# Altium PCB CW308T_LPC1343.PcbDoc
Units mil, origin at the board's own origin, x right, y up, seen from the top; angles counter-clockwise.
Board outline 2055 x 2540 mil, 2 copper layers (Top Layer, Bottom Layer); 20 components, 35 nets, 162 pads, 119 vias.
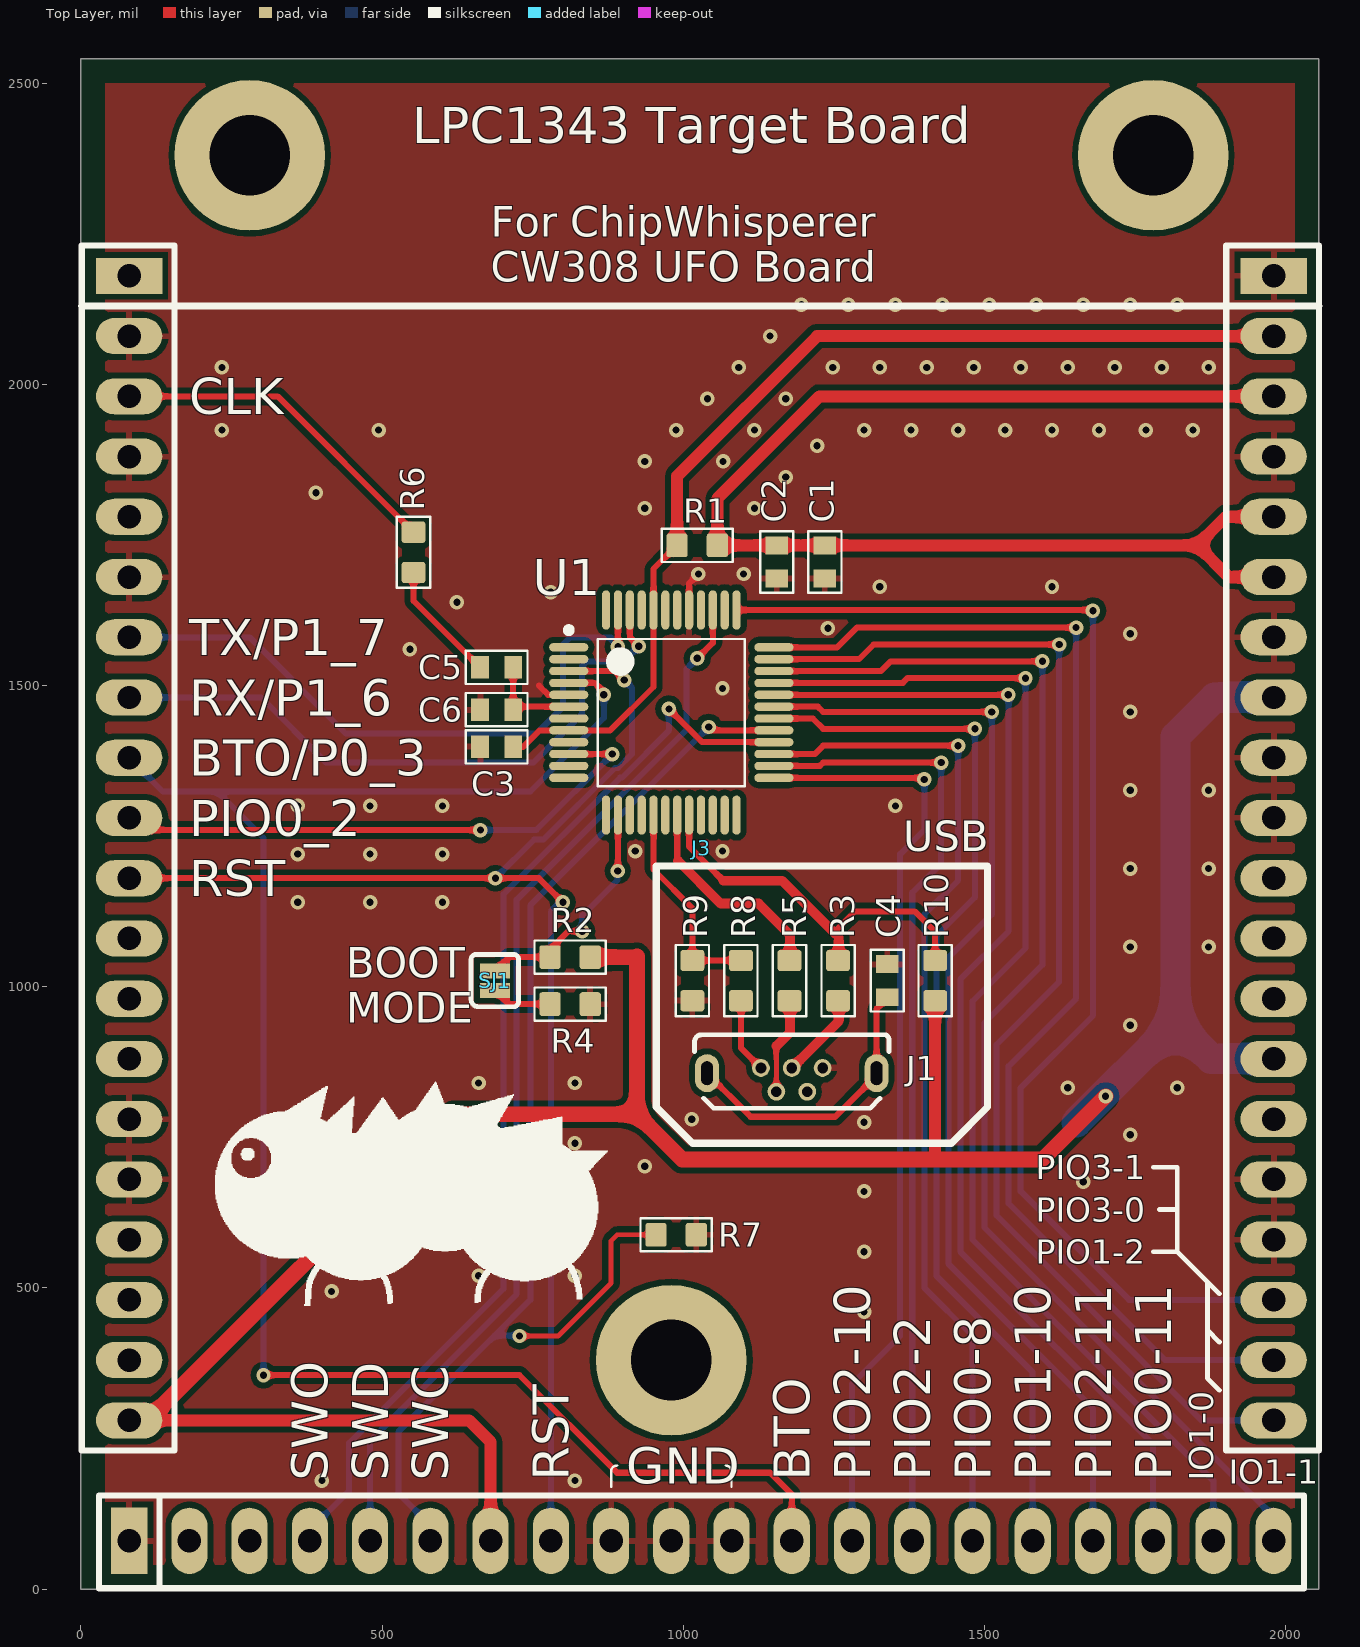
[diagram p0: Top Layer view]
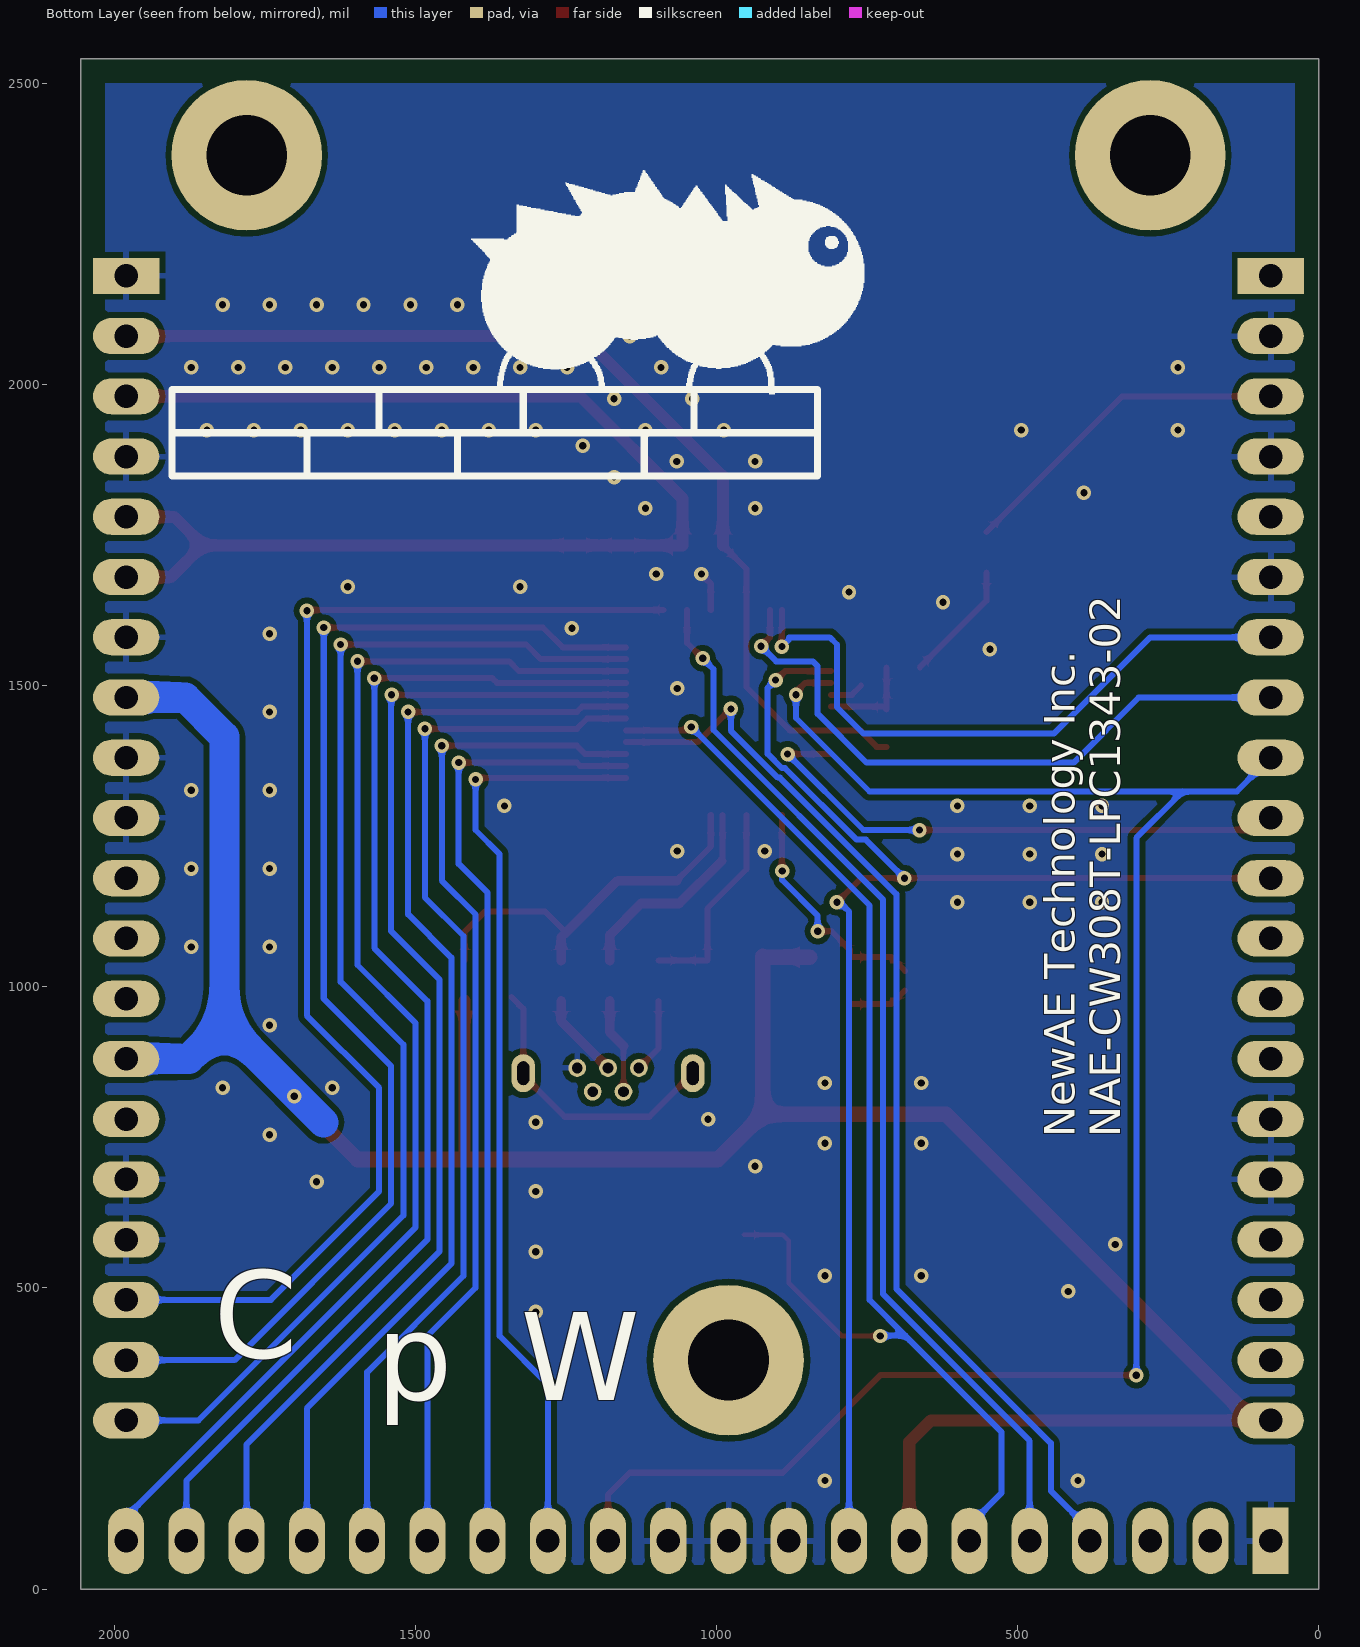
[diagram p1: Bottom Layer view, seen from below]

## Layer stack, top to bottom
Top Solder: solder mask 0.4, Solder Resist, Dk 3.5
Top Layer: signal copper 1.4
Dielectric 1: dielectric 12.6, FR-4, Dk 4.8
Bottom Layer: signal copper 1.4
Bottom Solder: solder mask 0.4, Solder Resist, Dk 3.5

## Board outline
0,0 2055,0 2055,2540 0,2540

## Design rules (kind name [scope] priority, off if disabled: settings)
BoardOutlineClearance Silk_to_Outline [(OnLayer('Top Overlay'))] p1: gap=0 ignorepadtopadclearanceinfootprint=FALSE
BoardOutlineClearance [All] p2: gap=40 ignorepadtopadclearanceinfootprint=FALSE
Clearance Clearance_Power [InNet('+*') OR InNet('-*') OR InNet('GND')] p1: gap=10 ignorepadtopadclearanceinfootprint=FALSE
Clearance [All] p2: gap=6 ignorepadtopadclearanceinfootprint=FALSE except(0: Arc-Hole Track-Hole SMDPad-Hole THPad-Hole Via-Hole Fill-Hole Poly-Hole Region-Hole Text-Hole)
DiffPairsRouting [InDifferentialPair('USBD')] p1: maxlimit=10 minlimit=8 mostfreqgap=8 toplayer_minwidth=8 toplayer_maxwidth=20 toplayer_prefwidth=16 bottomlayer_minwidth=8 bottomlayer_maxwidth=20 bottomlayer_prefwidth=16 substack1={8800B28A-0589-4E51-BD48-D091C3F5FEA0} toplayer_{8800b28a-0589-4e51-bd48-d091c3f5fea0}_minwidth=15 toplayer_{8800b28a-0589-4e51-bd48-d091c3f5fea0}_maxwidth=15 toplayer_{8800b28a-0589-4e51-bd48-d091c3f5fea0}_prefwidth=15 bottomlayer_{8800b28a-0589-4e51-bd48-d091c3f5fea0}_minwidth=15 bottomlayer_{8800b28a-0589-4e51-bd48-d091c3f5fea0}_maxwidth=15 bottomlayer_{8800b28a-0589-4e51-bd48-d091c3f5fea0}_prefwidth=15 maxuncoupledlength=500
HoleSize [All] p1: absolutevalues=TRUE maxlimit=200 minlimit=1 maxpercent=80.000 minpercent=20.000
MinimumSolderMaskSliver [All] p1: minsoldermaskwidth=5
PlaneConnect PlaneConnect_viaDirect [IsVia] p1: planeconnectstyle=Direct reliefexpansion=20 reliefentries=4 reliefconductorwidth=10 reliefairgap=10
PlaneConnect [All] p2: planeconnectstyle=Relief reliefexpansion=20 reliefentries=4 reliefconductorwidth=10 reliefairgap=10
PolygonConnect PolygonConnect_viaDirect [All vs isVia] p1: connectstyle=Direct reliefconductorwidth=10 reliefentries=4 polygonreliefangle="90 Angle" airgapwidth=10
PolygonConnect [All] p2: connectstyle=Relief reliefconductorwidth=10 reliefentries=4 polygonreliefangle="90 Angle" airgapwidth=10
RoutingVias [All] p1: holewidth=28 width=50 viastyle="Through Hole" minholewidth=28 minwidth=50 maxholewidth=28 maxwidth=50 useviatemplates=TRUE viatemplateguid#1={061DF218-48E8-48E5-9562-D50E5290F33F} viatemplateguid#2={ED942516-BDC6-4395-8D39-055E9FB32128} viatemplateguid#3={16B6B314-1114-45EC-9B74-E6FA84815E14} viatemplatename#1=v61h30m0mx0 viatemplatename#2=v86h41m0mx0 viatemplatename#3=v127h71m0mx0
SilkToSilkClearance [All] p1: silktosilkclearance=5
SilkToSolderMaskClearance [IsPad] p1: minsilkscreentomaskgap=5 clearancetoexposedcopper=TRUE
SolderMaskExpansion [All] p1: expansion=4 istentingtop=FALSE
Width [All] p1: maxlimit=100 minlimit=8 preferedwidth=10 substack1={8800B28A-0589-4E51-BD48-D091C3F5FEA0}
24 further rules are at their usual default settings.

## Classes and differential pairs
component class CW308T_LPC1343: C1 C2 C3 C4 C5 C6 J1 R1 R2 R3 R4 R5 R6 R8 R9 R10 SJ1 U1
component class Connectors: J3 R7
differential pair USBD: +USBD_P -USBD_N

## Components (designator, comment, footprint, x,y, rotation, side; value= is the part's Value field where it differs from the comment)
C1 "2u2" CAPC0603_M 1235,1705 r270 top
C2 "100n" CAPC0603_M 1155,1705 r270 top
C3 "100n" CAPC0603_M 690,1398 r180 top
C4 "100n" CAPC0603_M 1338.38,1010 r270 top
C5 "100p" CAPC0603_M 690,1530 r180 top
C6 "100p" CAPC0603_M 690,1460 r180 top
J1 "614105150721" 614105150721 1128.82,865 r0 top
J3 "CW308_TARGETCON" CW308_TBOARD_CONN 80,2180 r0 top locked
R1 "12R" RESC1608X55N 1023,1732.56 r180 top
R2 "10k" RESC1608X55N 812,1049 r180 top
R3 "33R" RESC1608X55N 1256.8,1010 r90 top
R4 "1k" RESC1608X55N 812,971 r0 top
R5 "33R" RESC1608X55N 1176.2,1010 r90 top
R6 "33R" RESC1608X55N 552,1721 r90 top
R7 "10k" RESC1608X55N 988,588 r0 top
R8 "1k" RESC1608X55N 1095.6,1010 r90 top
R9 "2k" RESC1608X55N 1015,1010 r270 top
R10 "1k5" RESC1608X55N 1418,1010 r90 top
SJ1 "NC" SJ_2S_NC 687,1010 r90 top
U1 "LPC1343FBD48" LQFP50P900X900X160-48M 980,1455 r0 top locked

## Footprints (in the part's own frame and the unit in brackets; to place one, negate y for a bottom-side part, rotate by r counter-clockwise, add the part's x,y. Pads: shape width x height; smd on the part's side, far side on the other; paste and mask are expansions set on the pad)
614105150721 [mm] "Upright USB"
  round 0.75 hole 0.45: 1(0,0) 2(0.65,-1) 3(1.3,0) 4(1.95,-1) 5(2.6,0)
  rrect100% 1x1.6 hole 0.5 slot 1 at 90 deg: S1(-2.275,-0.22) S2(4.875,-0.22)
  silkscreen extent -2.8,-1.7 5.4,1.4, body extent -2.7,-1.6 5.3,1.3, height 5.66
CAPC0603_M [mm]
  rect 0.75x0.95 smd: 1(-0.7,0) 2(0.7,0)
  silkscreen extent -1.3,-0.7 1.3,0.7, body extent -0.85,-0.45 0.85,0.45, height 0.9
CW308_TBOARD_CONN [mil]
  rect 110x60 hole 39: A1(0,0) C1(1900,0)
  oval 110x60 hole 39: A2(0,-100) A3(0,-200) A4(0,-300) A5(0,-400) A6(0,-500) A7(0,-600) A8(0,-700) A9(0,-800) A10(0,-900) A11(0,-1000) A12(0,-1100) A13(0,-1200) A14(0,-1300) A15(0,-1400) A16(0,-1500) A17(0,-1600) A18(0,-1700) A19(0,-1800) A20(0,-1900) C2(1900,-100) C3(1900,-200) C4(1900,-300) C5(1900,-400) C6(1900,-500) C7(1900,-600) C8(1900,-700) C9(1900,-800) C10(1900,-900) C11(1900,-1000) C12(1900,-1100) C13(1900,-1200) C14(1900,-1300) C15(1900,-1400) C16(1900,-1500) C17(1900,-1600) C18(1900,-1700) C19(1900,-1800) C20(1900,-1900)
  rect 60x110 hole 39: B1(0,-2100)
  oval 60x110 hole 39: B2(100,-2100) B3(200,-2100) B4(300,-2100) B5(400,-2100) B6(500,-2100) B7(600,-2100) B8(700,-2100) B9(800,-2100) B10(900,-2100) B11(1000,-2100) B12(1100,-2100) B13(1200,-2100) B14(1300,-2100) B15(1400,-2100) B16(1500,-2100) B17(1600,-2100) B18(1700,-2100) B19(1800,-2100) B20(1900,-2100)
  round 250 hole 134: MH1(200,200) MH2(900,-1800) MH2(1700,200)
  silkscreen extent -79,-2179 1975,50, body extent -50,-2149 1950,50, height 48
LQFP50P900X900X160-48M [mm] "LQFP, 48-Leads, Body 7.00x7.00mm, Pitch 0.50mm, IPC Low Density"
  oval 1.65x0.35 smd paste-0.051: 1(-4.325,2.75) 2(-4.325,2.25) 3(-4.325,1.75) 4(-4.325,1.25) 5(-4.325,0.75) 6(-4.325,0.25) 7(-4.325,-0.25) 8(-4.325,-0.75) 9(-4.325,-1.25) 10(-4.325,-1.75) 11(-4.325,-2.25) 12(-4.325,-2.75) 25(4.325,-2.75) 26(4.325,-2.25) 27(4.325,-1.75) 28(4.325,-1.25) 29(4.325,-0.75) 30(4.325,-0.25) 31(4.325,0.25) 32(4.325,0.75) 33(4.325,1.25) 34(4.325,1.75) 35(4.325,2.25) 36(4.325,2.75)
  oval 0.35x1.65 smd paste-0.051: 13(-2.75,-4.325) 14(-2.25,-4.325) 15(-1.75,-4.325) 16(-1.25,-4.325) 17(-0.75,-4.325) 18(-0.25,-4.325) 19(0.25,-4.325) 20(0.75,-4.325) 21(1.25,-4.325) 22(1.75,-4.325) 23(2.25,-4.325) 24(2.75,-4.325) 37(2.75,4.325) 38(2.25,4.325) 39(1.75,4.325) 40(1.25,4.325) 41(0.75,4.325) 42(0.25,4.325) 43(-0.25,4.325) 44(-0.75,4.325) 45(-1.25,4.325) 46(-1.75,4.325) 47(-2.25,4.325) 48(-2.75,4.325)
  silkscreen extent -4.45,-3.1 3.1,3.6, body extent -4.5,-4.5 4.5,4.5, height 1.6
RESC1608X55N [mm] "Chip Resistor, Body 1.6x0.8mm, EIA 0603, IPC Medium Density"
  round 0.254 on Mech15: 0(0,0)
  rrect25% 0.9x1 smd: 1(-0.85,0) 2(0.85,0)
  Top Layer pour cut-out: -0.6,0.5 0.6,0.5 0.6,-0.5 -0.6,-0.5
  silkscreen extent -1.5,-0.7 1.5,0.7, body extent -0.87,-0.47 0.88,0.48, height 0.54
SJ_2S_NC [mil] "Solder Jumper, closed with solder paste"
  rect 25x50 smd: 1(-16.22,0) 2(16.22,0)
  silkscreen extent -43,-39 43,39

## Part data
C1: library part CCHIP-2u2-0603, "2u2, 0603", Case-EIA=0603, Case-Metric=1608, Manufacture 1=Samsung, Manufacture Part Number 1=CL10B225KP8NNNC, Rated Voltage=10VDC, Supplier Part Number 1=1276-1134-2-ND, Component Group=Capacitor, Component Type=Standard, Mounting Technology=SMT, Part Number=CCHIP-2u2-0603, Pin Count=2, Supplier 1=Digi-Key
C2 C3 C4: library part CCHIP-100n-0603, "100n, 0603", Case-EIA=0603, Case-Metric=1608, Manufacture 1=Kemet, Manufacture Part Number 1=C0603C104K5RACTU, Rated Voltage=50VDC, Supplier Part Number 1=399-5089-2-ND, Component Group=Capacitor, Component Type=Standard, Mounting Technology=SMT, Part Number=CCHIP-100n-0603, Pin Count=2, Supplier 1=Digi-Key
C5 C6: library part CCHIP-100p-0603, "100p, 0603", Case-EIA=0603, Case-Metric=1608, Manufacture 1=KEMET, Manufacture Part Number 1=C0603C101K5RACTU, Rated Voltage=50V, Supplier Part Number 1=399-7824-1-ND, Component Group=Capacitor, Component Type=Standard, Mounting Technology=SMT, Part Number=CCHIP-100p-0603, Pin Count=2, RoHS=Yes, Supplier 1=Digi-Key
J1: "USB, 5-pin, Upright", Manufacture 1="Wurth Electronics", Supplier Part Number 1=732-5958-1-ND, Component Group=Connector, Component Type=Standard, Manufacture Part Number 1=614105150721, Mounting Technology=Through-hole, Part Number=614105150721, Pin Count=7, PP Material Stack=0, PP Rotation=0, RoHS=Yes, Supplier 1=Digi-Key
J3: library part CW308_TBOARD, "CW308 \"Standard\" Target Board Connector", Component Group=Mechanical, Component Type=Standard, Mounting Technology=Through-hole, Part Number=CW308_TBOARD, Pin Count=60, Pitch=2.54mm
R1: library part RCHIP-12R-0603, "12R res, 0603, 1%, 1/10W", Case-EIA=0603, Case-Metric=1608, Manufacture 1=Yageo, Manufacture Part Number 1=RC0603FR-0712RL, Rated Power=0.1W, Rated Voltage=75VDC, Supplier Part Number 1=311-12.0HRCT-ND, Temperature Range="-55C to 155C", Tolerance=1%, Component Group=Resistor, Component Type=Standard, Mounting Technology=SMT, Part Number=RCHIP-12R-0603, Pin Count=2, Supplier 1=Digi-Key
R2 R7: library part RCHIP-10K-0603, "10k res, 0603, 1%, 1/10W", Case-EIA=0603, Case-Metric=1608, Manufacture 1=Yageo, Manufacture Part Number 1=RC0603FR-0710KL, Rated Power=0.1W, Rated Voltage=75VDC, Supplier Part Number 1=311-10.0KHRCT-ND, Temperature Range="-55C to 155C", Tolerance=1%, Component Group=Resistor, Component Type=Standard, Mounting Technology=SMT, Part Number=RCHIP-10K-0603, Pin Count=2, Supplier 1=Digi-Key
R3 R5 R6: library part RCHIP-33R-0603, "33R res, 0603, 1%, 1/10W", Case-EIA=0603, Case-Metric=1608, Manufacture 1=Yageo, Manufacture Part Number 1=RC0603FR-0733RL, Rated Power=0.1W, Rated Voltage=75VDC, Supplier Part Number 1=311-33.0HRCT-ND, Temperature Range="-55C to 155C", Tolerance=1%, Component Group=Resistor, Component Type=Standard, Mounting Technology=SMT, Part Number=RCHIP-33R-0603, Pin Count=2, Supplier 1=Digi-Key
R4 R8: library part RCHIP-1K-0603, "1k res, 0603, 1%, 1/10W", Case-EIA=0603, Case-Metric=1608, Manufacture 1=Yageo, Manufacture Part Number 1=RC0603FR-071KL, Rated Power=0.1W, Rated Voltage=75VDC, Supplier Part Number 1=311-1.00KHRCT-ND, Temperature Range="-55C to 155C", Tolerance=1%, Component Group=Resistor, Component Type=Standard, Mounting Technology=SMT, Part Number=RCHIP-1K-0603, Pin Count=2, Supplier 1=Digi-Key
R9: library part RCHIP-2K-0603, "2k res, 0603, 1%, 1/10W", Case-EIA=0603, Case-Metric=1608, Manufacture 1=Yageo, Manufacture Part Number 1=RC0603FR-072KL, Rated Power=0.1W, Rated Voltage=75VDC, Supplier Part Number 1=311-2.00KHRCT-ND, Temperature Range="-55C to 155C", Tolerance=1%, Component Group=Resistor, Component Type=Standard, Mounting Technology=SMT, Part Number=RCHIP-2K-0603, Pin Count=2, Supplier 1=Digi-Key
R10: library part RCHIP-1K5-0603, "1k5 res, 0603, 1%, 1/10W", Case-EIA=0603, Case-Metric=1608, Manufacture 1=Yageo, Manufacture Part Number 1=RC0603FR-071K5L, Rated Power=0.1W, Rated Voltage=75VDC, Supplier Part Number 1=311-1.50KHRCT-ND, Temperature Range="-55C to 155C", Tolerance=1%, Component Group=Resistor, Component Type=Standard, Mounting Technology=SMT, Part Number=RCHIP-1K5-0603, Pin Count=2, Supplier 1=Digi-Key
SJ1: library part SJ_2S, "Solder Jumper, NC", Component Group="PCB Feature", Component Type="Standard (No BOM)", Mounting Technology=COPPER, Part Number=SJ_2S, Pin Count=2

## Via types
v1: diameter 24, hole 12, Top Layer to Bottom Layer, tented both sides, 119 vias

## Nets (pads, with @x,y where several pads share a name; then routed paths per layer and width w, separated by ;. In a path a pad name is that pad's centre, name@x,y a point inside that pad or via, vN(x,y) a via of type N, cw(c..) or ccw(c..) an arc to the next point about the centre after c; other vN are vias at no path point)
+3v3: J3.A20 J3.B7 J3.C8 J3.C14 R2.1 R10.1 | length 4343.4
  Top Layer w20: J3.A20 111,280 644,280 680,244 J3.B7 ; 1418,713 R10.1
  Top Layer w26: J3.A20@111,280 619,788 923,788 ; R2.1 922,1049 923,1050 923,788 ; v1(1701,818) 1596,713 1418,713 998,713 923,788
  Bottom Layer w50: 1652.5,774.5 1817,939 ; J3.C14 1876,880 1817,939 ; J3.C8 1882,1480 1817,1415 1817,939
+3v3_CORE: C3.1 J3.C2 R1.2 U1.8 U1.44 | length 1727.1
  Top Layer w10: C3.1 734,1398 761.47,1425.47 U1.8 878.47,1425.47 950.47,1497.47 U1.44 950.47,1693.5 R1.2
  Top Layer w20: R1.2 989.54,1847.54 1222,2080 J3.C2
+3v3_FILT: C1.1 C2.1 J3.C3 J3.C5 J3.C6 R1.1 | length 2163.6
  Top Layer w20: J3.C6 1905.56,1680 1853,1732.56 ; J3.C5 1900.44,1780 1853,1732.56 ; J3.C3 1226,1980 1056.46,1810.46 R1.1 C2.1 C1.1 1853,1732.56
BOOTSEL: R2.2 SJ1.2 U1.14 | length 396.9
  Top Layer w10: SJ1.2 709.78,1049 R2.2 778.54,1061.54 809,1092 v1(832,1092) ; v1(891,1192) 891.42,1192.42 U1.14
  Bottom Layer w10: v1(832,1092) 832,1118 891,1177 v1(891,1192)
CLKIN: J3.A3 R6.2 | length 565.4
  Top Layer w10: J3.A3 326.46,1980 R6.2
GND: C1.2 C2.2 C3.2 C4.1 C6.2 J1.5 J3.A2 J3.A4 J3.A6 J3.A15 J3.A16 J3.B1 J3.B9 J3.B10 J3.B11 J3.C1 J3.C4 J3.C7 J3.C9 J3.C10 J3.C16 J3.C17 R4.2 R7.2 R9.2 U1.5 U1.41 | length 115.2
  Top Layer w10: 760,1500 775.47,1484.53 U1.5 ; U1.41 1009.53,1669.53 v1@1020,1680
  other v1: 400,180 820,180 1300,460 416,494 660,520 820,520 1300,560 338,572 1300,660 1664,676 936,702 660,740 820,740 1742,754 1300,775 1014,780 1638,832 1820,832 660,840 820,840 1742,936 1742,1066 1872,1066 360,1140 480,1140 600,1140 1742,1196 1872,1196 360,1220 480,1220 600,1220 920,1225 1065,1225 360,1300 480,1300 600,1300 1352,1300 1742,1326 1872,1326 1742,1456 1065,1495 546,1560 1742,1586 1240,1595 624,1638 780,1655 1326,1664 1612,1664 1025,1685 1100,1685 936,1794 1118,1794 390,1820 1170,1846 936,1872 1066,1872 1222,1898 234,1924 494,1924 988,1924 1118,1924 1300,1924 1378,1924 1456,1924 1534,1924 1612,1924 1690,1924 1768,1924 1846,1924 1040,1976 1170,1976 234,2028 1092,2028 1248,2028 1326,2028 1404,2028 1482,2028 1560,2028 1638,2028 1716,2028 1794,2028 1872,2028 1144,2080 1196,2132 1274,2132 1352,2132 1430,2132 1508,2132 1586,2132 1664,2132 1742,2132 1820,2132
GPIO1: J3.A7 U1.47 | length 1074.3
  Top Layer w10: v1(891.42,1564.58) U1.47
  Bottom Layer w10: J3.A7 280,1580 440,1420 756,1420 800,1464 800,1568 812,1580 880,1580 880,1576 v1(891.42,1564.58)
GPIO2: J3.A8 U1.46 | length 1083.4
  Top Layer w10: U1.46 911.1,1579.9 v1(926,1565)
  Bottom Layer w10: J3.A8 299,1480 407,1372 751,1372 832,1453 832,1532 840,1540 901,1540 v1(926,1565)
GPIO3/H2: J3.A9 J3.B12 U1.4 | length 3006.2
  Top Layer w10: v1(303,355) 728,355 890,193 1144,193 1180,157 J3.B12 ; U1.4 852.79,1504.21 868,1489 v1(868,1484.53)
  Bottom Layer w10: J3.A9 136,1324 226,1324 ; v1(303,355) 303,1247 226,1324 ; v1(868,1484.53) 868,1446 746,1324 226,1324
GPIO4: J3.A10 U1.10 | length 934.8
  Top Layer w10: J3.A10 100,1260 v1(663,1260) ; U1.10 881.9,1386.1 v1(882,1386)
  Bottom Layer w10: v1(663,1260) 756,1260 v1(882,1386)
H3: J3.B13 U1.25 | length 1564.6
  Top Layer w10: U1.25 1397.27,1346.73 v1(1400,1344)
  Bottom Layer w10: J3.B13 1280,340 1360,420 1360,1220 1400,1260 v1(1400,1344)
H4: J3.B14 U1.26 | length 1591.9
  Top Layer w10: U1.26 1226.42,1366.42 1232,1372 v1(1428,1372)
  Bottom Layer w10: J3.B14 1380,1156 1428,1204 v1(1428,1372)
H5: J3.B15 U1.27 | length 1687.8
  Top Layer w10: U1.27 1218.1,1386.1 1232,1400 v1(1456,1400)
  Bottom Layer w10: v1(1456,1400) 1456,1176 1400,1120 1400,500 1480,420 J3.B15
H6: J3.B16 U1.30 | length 1781.6
  Top Layer w10: U1.30 1214.84,1445.16 1232,1428 v1(1484,1428)
  Bottom Layer w10: v1(1484,1428) 1484,1148 1420,1084 1420,520 1580,360 J3.B16
H7: J3.B17 U1.31 | length 1870.6
  Top Layer w10: U1.31 1223.16,1464.84 1232,1456 v1(1512,1456)
  Bottom Layer w10: v1(1512,1456) 1512,1120 1440,1048 1440,540 1680,300 J3.B17
H8: J3.B18 U1.32 | length 1960.2
  Top Layer w10: U1.32 v1(1539.47,1484.53) v1@1540,1484
  Bottom Layer w10: v1@1540,1484.53 1540,1092 1460,1012 1460,560 1780,240 J3.B18
H9: J3.B19 U1.33 | length 2055.1
  Top Layer w10: U1.33 1364.21,1504.21 1372,1512 v1(1568,1512)
  Bottom Layer w10: v1(1568,1512) 1568,1064 1480,976 1480,580 1880,180 J3.B19
H10: J3.B20 U1.34 | length 2151
  Top Layer w10: U1.34 1327.9,1523.9 1344,1540 v1(1596,1540)
  Bottom Layer w10: v1(1596,1540) 1596,1036 1500,940 1500,600 1980,120 J3.B20
LED_1: J3.C18 U1.37 | length 2101.8
  Top Layer w10: U1.37 1678.72,1625.28 v1(1680,1624)
  Bottom Layer w10: v1@1680,1625.28 1680,952 1560,832 1560,660 1740,480 J3.C18
LED_2: J3.C19 U1.36 | length 2065.4
  Top Layer w10: U1.36 1255.27,1563.27 1288,1596 v1(1652,1596)
  Bottom Layer w10: v1(1652,1596) 1652,980 1540,868 1540,640 1800,380 J3.C19
LED_3: J3.C20 U1.35 | length 2075.7
  Top Layer w10: U1.35 1291.58,1543.58 1316,1568 v1(1624,1568)
  Bottom Layer w10: v1(1624,1568) 1624,1008 1520,904 1520,620 1860,280 J3.C20
NetC4_2: C4.2 J1.S1 J1.S2 | length 477.6
  Top Layer w10: J1.S1 1111.59,784 1252,784 1320.75,852.75 J1.S2 1320.75,963.19 C4.2@1340,982.44
NetC5_1: C5.1 C6.1 U1.6 | length 164.2
  Top Layer w10: C5.1 C6.1 722.4,1464.84 U1.6
NetC5_2: C5.2 R6.1 | length 203.3
  Top Layer w10: R6.1 552,1640.44 C5.2
NetR3_2: R3.2 R10.2 U1.20 | length 646.3
  Top Layer w10: U1.20 1009.53,1232.47 1066,1176 ; 1251,1089 1251,1091 1285,1125 1384,1125 1418,1091 R10.2
  Top Layer w16: 1066,1176 1164,1176 1251,1089 1258.01,1081.99 R3.2@1258.01,1043.46
NetR4_1: R4.1 SJ1.1 | length 101
  Top Layer w10: SJ1.1 709.78,971 R4.1
NetR5_2: R5.2 U1.19 | length 355.7
  Top Layer w10: U1.19 989.84,1210.16 991,1209
  Top Layer w16: 991,1209 1062,1138 1125,1138 1177.01,1085.99 R5.2@1177.01,1043.46
RST: J3.A11 J3.B8 U1.3 | length 2351.7
  Top Layer w10: J3.A11 v1(688,1180) 760,1180 v1(800,1140) ; U1.3 886.1,1523.9 901,1509 v1(902,1509)
  Bottom Layer w10: v1(688,1180) 752,1244 767.44,1244 886.44,1363 891.53,1363 915,1386.47 915,1496 v1(902,1509) ; J3.B8 780,1125 795,1140 v1(800,1140) v1@800,1145
SWC: J3.B6 R7.1 U1.29 | length 2105
  Top Layer w8: v1(728,420) 792,420 880,508 880,578 890,588 R7.1
  Top Layer w10: J3.B6 J3.B6@580,106.54 ; v1(1042,1431) 1042,1433 1049.53,1425.47 U1.29
  Bottom Layer w10: J3.B6 580,106 527,159 527,261 686.5,420.5 ; v1(728,420) 727.5,420.5 686.5,420.5 ; v1(1042,1431) 746,1135 746,480 686.5,420.5
SWD: J3.B5 U1.39 | length 1780.9
  Top Layer w10: v1(1023,1545) 1048.9,1570.9 U1.39
  Bottom Layer w10: J3.B5 480,246 723.37,489.37 723.37,1144.37 1005,1426 1005,1527 v1(1023,1545)
SWO: J3.B4 U1.28 | length 1826.9
  Top Layer w10: v1(976,1461) 1031.21,1405.79 U1.28
  Bottom Layer w10: J3.B4 380,98 445,163 445,242 701.45,498.45 701.45,1153.45 895,1347 898.15,1347 976,1424.85 v1(976,1461)
USB_DETECT: R8.2 R9.1 U1.17 | length 349
  Top Layer w10: U1.17 950.47,1194.53 1015,1130 R9.1 R8.2@1096,1043.46
USB_VBUS: J1.1 R8.1 | length 125.1
  Top Layer w10: R8.1@1096,976.54 1096,897.82 J1.1
USBD_N: J1.2 R5.1 | length 160.3
  Top Layer w8: J1.2 1154.41,901.41
  Top Layer w16: 1154.41,901.41 1177.01,924.01 R5.1@1177.01,976.54
USBD_P: J1.3 R3.1 | length 143.8
  Top Layer w16: J1.3 1258.01,943.01 R3.1@1258.01,976.54
pads on no net: J1.4 J3.A1 J3.A5 J3.A12 J3.A13 J3.A14 J3.A17 J3.A18 J3.A19 J3.B2 J3.B3 J3.C11 J3.C12 J3.C13 J3.C15 J3.MH1 J3.MH2 R1.0 R2.0 R3.0 R4.0 R5.0 R6.0 R7.0 R8.0 R9.0 R10.0 U1.1 U1.2 U1.7 U1.9 U1.11 U1.12 U1.13 U1.15 U1.16 U1.18 U1.21 U1.22 U1.23 U1.24 U1.38 U1.40 U1.42 U1.43 U1.45 U1.48

## Polygon pours and split planes (outlines as drawn)
GND on Bottom Layer "GND_L02_P000" (solid, remove dead copper, pour order 0): 0,2540 0,0 2060,0 2060,2540
GND on Top Layer "GND_L01_P002" (solid, remove dead copper, pour order 2): 0,0 0,2540 2060,2540 2060,0

## Silkscreen, mask and mechanical layers (free items; w line width, h text height)
Top Overlay:
  drawing of 24 lines, arcs and shapes, not listed
  text "LPC1343 Target Board" at 550,2400 h60
  text "For ChipWhisperer / CW308 UFO Board" at 680,2170 h50
  text "CLK" at 180,1950 h60
  text "TX/P1_7" at 180,1550 h60
  text "RX/P1_6" at 180,1450 h60
  text "BTO/P0_3" at 180,1350 h60
  text "PIO0_2" at 180,1250 h60
  text "USB" at 1365,1225 h50
  text "RST" at 180,1150 h60
  text "BOOT / MODE" at 440,940 h50
  text "PIO3-1" at 1585,680 h40
  text "PIO3-0" at 1585,610 h40
  text "PIO1-2" at 1585,540 h40
  text "SWO" at 410,180 h60 r90
  text "SWD" at 510,180 h60 r90
  text "SWC" at 610,180 h60 r90
  text "RST" at 810,180 h60 r90
  text "BTO" at 1210,180 h60 r90
  text "PIO2-10" at 1310,180 h60 r90
  text "PIO2-2" at 1410,180 h60 r90
  text "PIO0-8" at 1510,180 h60 r90
  text "PIO1-10" at 1610,180 h60 r90
  text "PIO2-11" at 1710,180 h60 r90
  text "PIO0-11" at 1810,180 h60 r90
  text "IO1-0" at 1880,180 h40 r90
  text "GND" at 905,175 h60
  text "IO1-1" at 1905,175 h40
Bottom Overlay:
  drawing of 18 lines, arcs and shapes, not listed
  text "NewAE Technology Inc. / NAE-CW308T-LPC1343-02" at 330,750 h50 r270
  text "C" at 1835,335 h250
  text "W" at 1325,265 h250
  text "p" at 1565,265 h250
Mechanical 1:
  the board outline again, w12